# EAGLE board Input Shift In (EAGLE 7.6.0)

Size 73.58 x 63.39 mm. Coordinates in mm from the lower left corner, seen from the top.
Outline: 0,0 56.82,0 56.82,53.33 0,53.33 0,0
Copper layers (1*16): Top 0.035mm / dielectric 1.5mm / Bottom 0.035mm
Design rules "default": minimum track width 10mil, minimum drill 24mil, track to track 8mil, track to pad 8mil, pad to pad 8mil, via to via 8mil, smd to smd 8mil, copper to edge 40mil, drill to drill 8mil, minimum pad ring 10mil, minimum via ring 8mil, stop-mask expansion 4mil, vias tented up to drill 0mil, thermal gap 10mil

## Footprints (pad centres in the part's own frame; a part is rotated, then mirrored left to right if it is on the bottom)
1X3P-2.54-2.54-11.6-3.0-BLACK-MALE = drill 0.889 pad 1.651 square: 1 0,2.54 | drill 0.889 pad 1.651: 2 0,0; 3 0,-2.54
0207/10 = drill 0.813 octagon: 1 -5.08,0; 2 5.08,0
TL1105 = drill 1 pad 1.676: 1 -2.25,3.25; 2 2.25,3.25; 3 -2.25,-3.25; 4 2.25,-3.25
ARDUINO_UNO = drill 1.016 pad 1.88: 0 63.5,50.8; 1 60.96,50.8; 2 58.42,50.8; 3 55.88,50.8; 3.3V 35.56,2.54; 4 53.34,50.8; 5 50.8,50.8; 5V 38.1,2.54; 6 48.26,50.8; 7 45.72,50.8; 8 41.656,50.8; 9 39.116,50.8; 10 36.576,50.8; 11 34.036,50.8; 12 31.496,50.8; 13 28.956,50.8; A0 50.8,2.54; A1 53.34,2.54; A2 55.88,2.54; A3 58.42,2.54; A4 60.96,2.54; A5 63.5,2.54; AREF 23.876,50.8; GND 26.416,50.8; GND. 43.18,2.54; GND.. 40.64,2.54; I/OREF 30.48,2.54; N/C 27.94,2.54; RESET 33.02,2.54; SCL 18.796,50.8; SDA 21.336,50.8; VIN 45.72,2.54 | hole 3.2: 66.04,7.62; 66.04,35.56; 15.24,50.8; 13.97,2.54
DIL16 = drill 0.813 long: 1 -8.89,-3.81; 2 -6.35,-3.81; 3 -3.81,-3.81; 4 -1.27,-3.81; 5 1.27,-3.81; 6 3.81,-3.81; 7 6.35,-3.81; 8 8.89,-3.81; 9 8.89,3.81; 10 6.35,3.81; 11 3.81,3.81; 12 1.27,3.81; 13 -1.27,3.81; 14 -3.81,3.81; 15 -6.35,3.81; 16 -8.89,3.81

## Placement (x,y rotation side)
PIR1  [1X3P-2.54-2.54-11.6-3.0-BLACK-MALE]  5,251.38 0 top  (outside the outline)
PIR2  [1X3P-2.54-2.54-11.6-3.0-BLACK-MALE]  5,264.08 0 top  (outside the outline)
PIR3  [1X3P-2.54-2.54-11.6-3.0-BLACK-MALE]  5,276.78 0 top  (outside the outline)
R1  1k‎Ω  [0207/10]  5,149.78 0 top  (outside the outline)
R2  1k‎Ω  [0207/10]  5,162.48 0 top  (outside the outline)
R3  1k‎Ω  [0207/10]  5,175.18 0 top  (outside the outline)
R4  1k‎Ω  [0207/10]  5,187.88 0 top  (outside the outline)
R5  1k‎Ω  [0207/10]  5,200.58 0 top  (outside the outline)
R6  1k‎Ω  [0207/10]  5,213.28 0 top  (outside the outline)
R7  1k‎Ω  [0207/10]  5,225.98 0 top  (outside the outline)
R8  1k‎Ω  [0207/10]  5,238.68 0 top  (outside the outline)
S1  [TL1105]  5,48.18 0 top
S2  [TL1105]  5,60.88 0 top
S3  [TL1105]  5,73.58 0 top  (outside the outline)
S4  [TL1105]  5,86.28 0 top  (outside the outline)
S5  [TL1105]  5,98.98 0 top  (outside the outline)
S6  [TL1105]  5,111.68 0 top  (outside the outline)
S7  [TL1105]  5,124.38 0 top  (outside the outline)
S8  [TL1105]  5,137.08 0 top  (outside the outline)
U1  [ARDUINO_UNO]  5,10.08 0 top
U2  [DIL16]  5,22.78 0 top
U3  [DIL16]  5,35.48 0 top

## Library data of the parts
PIR1-PIR3 R1-R8 S1-S8 U1-U3 = AUTODESK_CIRCUITS_BREADBOARD

## Nets
N$1: U1.4 U2.1 U3.1
N$2: R6.1 S6.2 U2.4
N$3: R8.1 S8.2 U2.6
N$4: U2.7
N$5: U1.7 U2.2 U3.2
N$6: R3.1 S3.2 U2.13
N$7: U2.10 U3.9
N$8: R1.1 S2.2 U2.12
N$9: R7.1 S7.2 U2.5
N$10: R4.1 S4.2 U2.14
N$11: U1.5 U2.15 U3.15
N$12: R5.1 S5.2 U2.3
N$13: U1.6 U2.9
N$14: R2.1 S1.2 U2.11
N$15: U3.4
N$16: U3.6
N$17: U3.7
N$18: PIR3.2 U3.13
N$19: U3.10
N$20: PIR2.2 U3.12
N$21: U3.5
N$22: U3.14
N$23: PIR1.2 U3.11
N$24: S2.3
N$25: S3.3
N$26: S4.3
N$27: S5.3
N$28: S6.3
N$29: S7.3
N$30: S8.3
N$31: PIR1.3 PIR2.3 PIR3.3 U1.GND. U2.8 U3.8
N$32: U3.3
N$33: PIR1.1 PIR2.1 PIR3.1 R1.2 R2.2 R3.2 R4.2 R5.2 R6.2 R7.2 R8.2 S1.1 S2.1 S3.1 S4.1 S5.1 S6.1 S7.1 S8.1 U1.5V U2.16 U3.16
N$34: S1.3
N$35: S1.4
N$36: S2.4
N$37: S3.4
N$38: S4.4
N$39: S5.4
N$40: S6.4
N$41: S7.4
N$42: S8.4

## Tracks (layer width: path | path; a pad name or v marks a point on that pad's centre or on a via)
N$1  (2 unrouted)
N$2  (2 unrouted)
N$3  (2 unrouted)
N$5  (2 unrouted)
N$6  (2 unrouted)
N$7  (1 unrouted)
N$8  (2 unrouted)
N$9  (2 unrouted)
N$10  (2 unrouted)
N$11  (2 unrouted)
N$12  (2 unrouted)
N$13  (1 unrouted)
N$14  (2 unrouted)
N$18  (1 unrouted)
N$20  (1 unrouted)
N$23  (1 unrouted)
N$31  (5 unrouted)
N$33  (21 unrouted)